# Altium PCB Smart_AC_Monitor.PcbDoc
Units mm, origin at the board's own origin, x right, y up, seen from the top; angles counter-clockwise.
Board outline 100 x 60 mm, 2 copper layers (Top Layer, Bottom Layer); 25 components, 14 nets, 116 pads, 52 vias.
Unrouted connection lines stored in the file: 3.
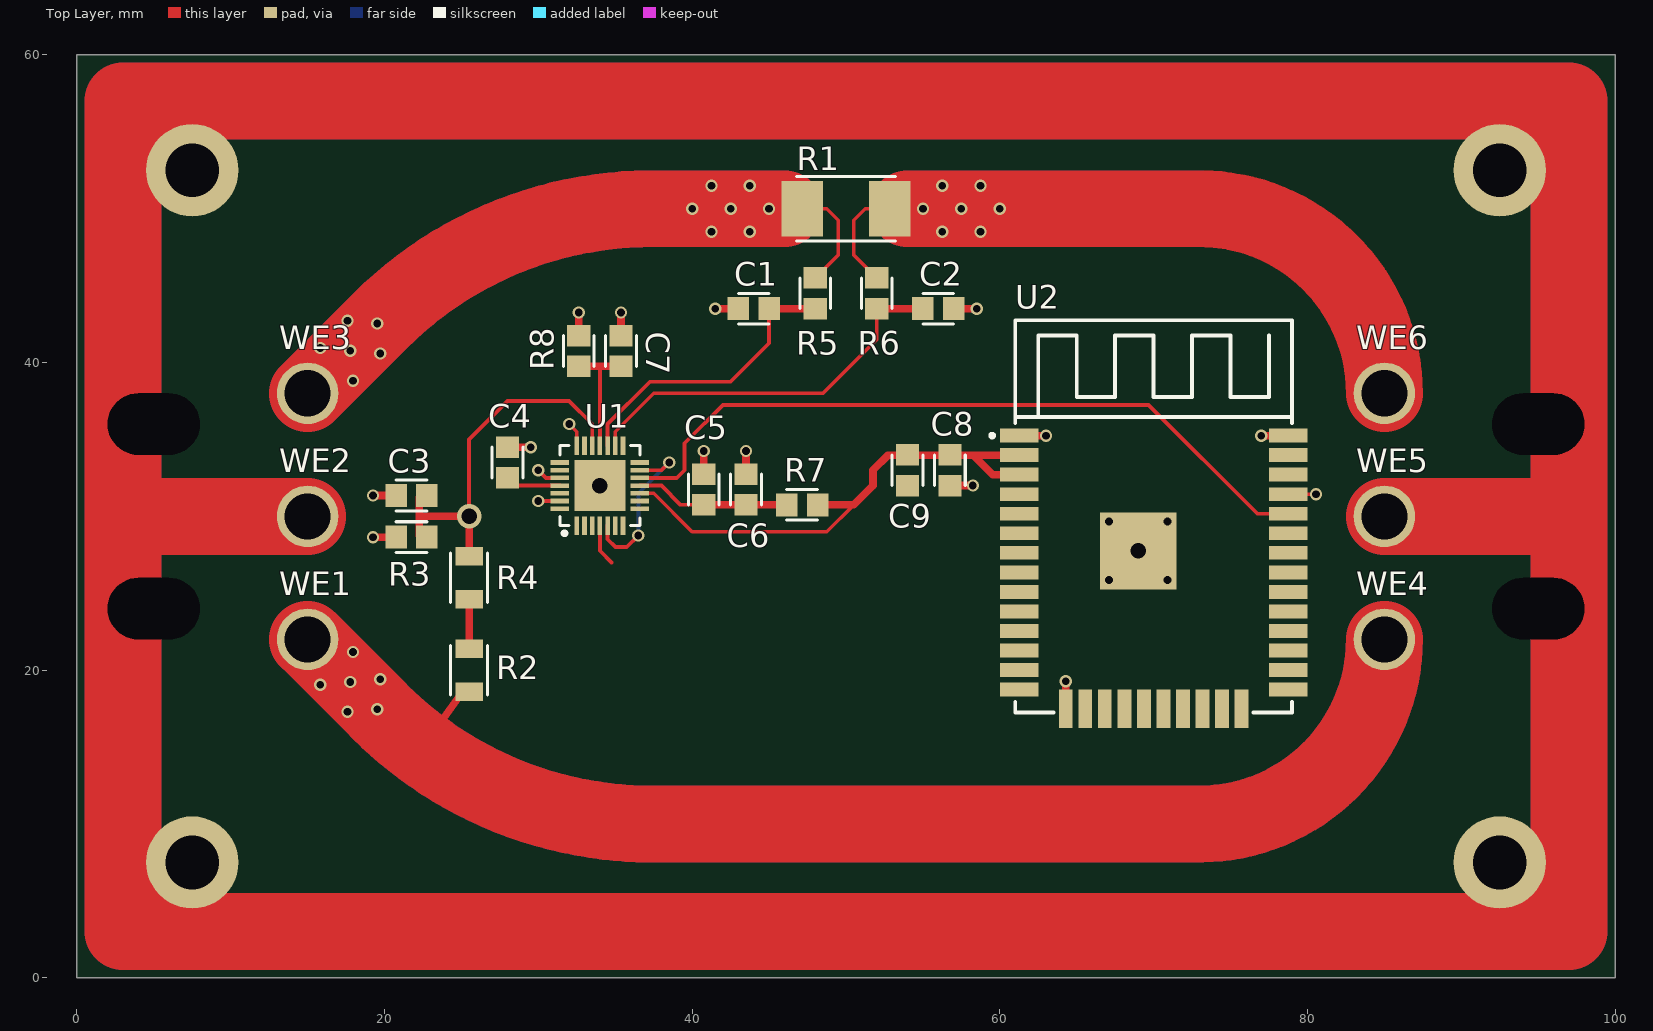
[diagram p0: Top Layer view]
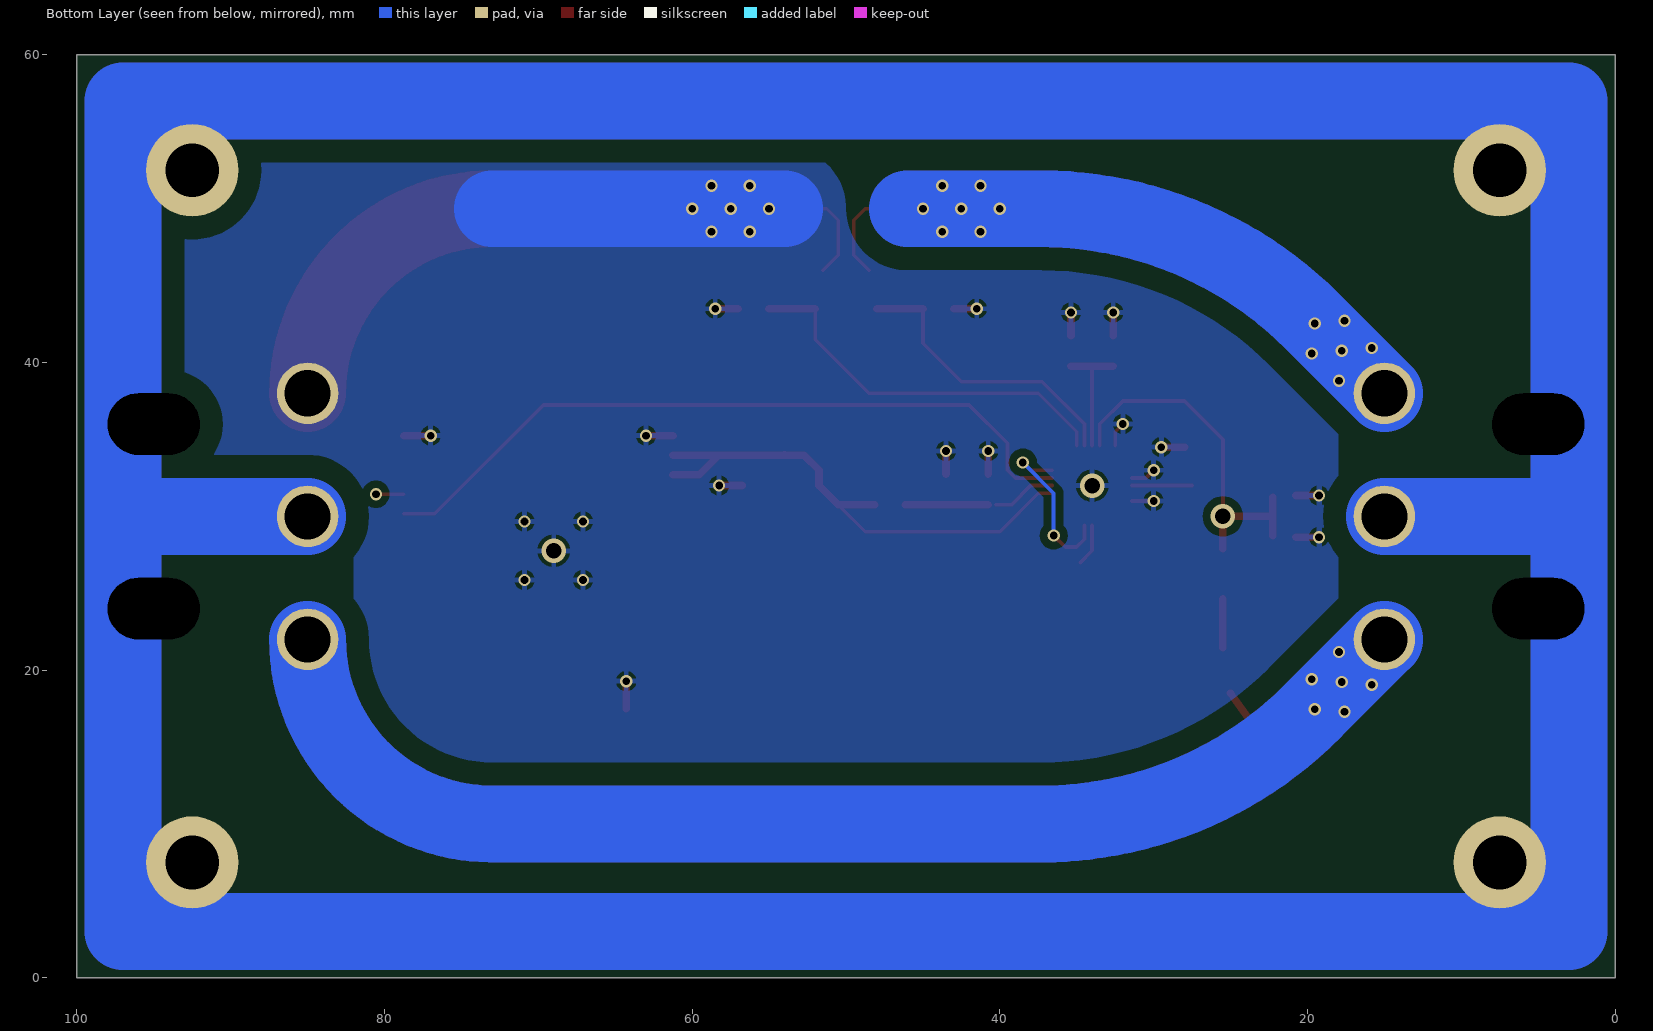
[diagram p1: Bottom Layer view, seen from below]

## Layer stack, top to bottom
Top Solder: solder mask 0.0102, Solder Resist, Dk 3.5
Top Layer: signal copper 0.0356
Dielectric 1: dielectric 0.32, FR-4, Dk 4.8
Bottom Layer: signal copper 0.0356
Bottom Solder: solder mask 0.0102, Solder Resist, Dk 3.5

## Board outline
0,0 100,0 100,60 0,60

## Design rules (kind name [scope] priority, off if disabled: settings)
Clearance Clearance_2 [InNamedPolygon('GND_L02_P000') vs InNet('EARTH')] p1: gap=1.5 ignorepadtopadclearanceinfootprint=FALSE
Clearance Clearance_4 [InNamedPolygon('GND_L02_P000') vs InNet('AC Neutral In')] p2: gap=1.5 ignorepadtopadclearanceinfootprint=FALSE
Clearance Clearance_3 [InNamedPolygon('GND_L02_P000') vs InNet('AC Live')] p3: gap=1.5 ignorepadtopadclearanceinfootprint=FALSE
Clearance Clearance_1 [InNamedPolygon('GND_L02_P000')] p4: gap=0.5 ignorepadtopadclearanceinfootprint=FALSE
Clearance [All] p5: gap=0.1 ignorepadtopadclearanceinfootprint=FALSE
PolygonConnect [All] p1: thpad.connectstyle=Direct thpad.reliefconductorwidth=0.254 thpad.reliefentries=4 thpad.polygonreliefangle="90 Angle" thpad.airgapwidth=0.254 smdpad.connectstyle=Direct smdpad.reliefconductorwidth=0.254 smdpad.reliefentries=4 smdpad.polygonreliefangle="90 Angle" smdpad.airgapwidth=0.254 via.connectstyle=Relief via.reliefconductorwidth=0.35 via.reliefentries=4 via.polygonreliefangle="90 Angle" via.airgapwidth=0.25
RoutingVias [All] p1: holewidth=0.5 width=0.6 viastyle="Through Hole" minholewidth=0.5 minwidth=0.8 maxholewidth=2.5 maxwidth=4
SolderMaskExpansion [All] p1: expansion=0.102
Width [All] p1: maxlimit=10 minlimit=0.2 preferedwidth=0.254 minimp=50.000000 maximp=50.000000 favimp=50.000000
30 further rules are at their usual default settings.

## Components (designator, comment, footprint, x,y, rotation, side; value= is the part's Value field where it differs from the comment)
C1 "Capacitor" 0805 44,43.5 r180 top
C2 "Capacitor" 0805 56,43.5 r0 top
C3 "Capacitor" 0805 21.75,31.35 r180 top
C4 "Capacitor" 0805 28,33.5 r90 top
C5 "Capacitor" 0805 40.75,31.75 r90 top
C6 "Capacitor" 0805 43.5,31.75 r90 top
C7 "Capacitor" 0805 35.375,40.75 r90 top
C8 "Capacitor" 0805 56.75,33 r270 top
C9 "Capacitor" 0805 54,33 r270 top
R1 "Resistor" 2512 50,50 r0 top
R2 "Resistor" 1206 25.5,20 r90 top
R3 "Resistor" 0805 21.75,28.65 r180 top
R4 "Resistor" 1206 25.5,26 r90 top
R5 "Resistor" 0805 48,44.5 r270 top
R6 "Resistor" 0805 52,44.5 r270 top
R7 "Resistor" 0805 47.15,30.75 r0 top
R8 "Resistor" 0805 32.625,40.75 r270 top
U1 "MCP39F511" MCP39F511 34,32 r90 top
U2 "ESP32-WROOM-32D" ESP32-WROOM-32D 70,35.25 r0 top
WE1 "Wire Entry" 12AWGWireEntry 15,22 r0 top
WE2 "Wire Entry" 12AWGWireEntry 15,30 r0 top
WE3 "Wire Entry" 12AWGWireEntry 15,38 r0 top
WE4 "Wire Entry" 12AWGWireEntry 85,22 r0 top
WE5 "Wire Entry" 12AWGWireEntry 85,30 r0 top
WE6 "Wire Entry" 12AWGWireEntry 85,38 r0 top

## Footprints (in the part's own frame and the unit in brackets; to place one, negate y for a bottom-side part, rotate by r counter-clockwise, add the part's x,y. Pads: shape width x height; smd on the part's side, far side on the other; paste and mask are expansions set on the pad)
12AWGWireEntry [mm]
  round 4 hole 3: 1(0,0)
0805 [mm] "Chip Resistor, Body 2.0x1.2mm, IPC Low Density"
  rect 1.4x1.5 smd: 1(-1,0) 2(1,0)
  silkscreen extent -1,-1 1,1, body extent -1.07,-0.7 1.07,0.7, height 0.7
1206 [mm] "Chip Resistor, Body 3.2x1.6mm"
  rect 1.2x1.8 smd: 1(-1.4,0) 2(1.4,0)
  silkscreen extent -1.6,-1.2 1.6,1.2, body extent -1.6,-0.8 1.6,0.8, height 0.7
2512 [mm] "Chip Resistor, Body 6.4x3.2mm, IPC Low Density"
  rect 2.7x3.6 smd: 1(-2.85,0) 2(2.85,0)
  silkscreen extent -3.2,-2.1 3.2,2.1, body extent -3.2,-1.6 3.2,1.6, height 0.7
ESP32-WROOM-32D [mm]
  rect 2.5x0.9 smd: 1(-8.75,0) 2(-8.75,-1.27) 3(-8.75,-2.54) 4(-8.75,-3.81) 5(-8.75,-5.08) 6(-8.75,-6.35) 7(-8.75,-7.62) 8(-8.75,-8.89) 9(-8.75,-10.16) 10(-8.75,-11.43) 11(-8.75,-12.7) 12(-8.75,-13.97) 13(-8.75,-15.24) 14(-8.75,-16.51) 25(8.75,-16.51) 26(8.75,-15.24) 27(8.75,-13.97) 28(8.75,-12.7) 29(8.75,-11.43) 30(8.75,-10.16) 31(8.75,-8.89) 32(8.75,-7.62) 33(8.75,-6.35) 34(8.75,-5.08) 35(8.75,-3.81) 36(8.75,-2.54) 37(8.75,-1.27) 38(8.75,0)
  rect 0.9x2.5 smd: 15(-5.715,-17.76) 16(-4.445,-17.76) 17(-3.175,-17.76) 18(-1.905,-17.76) 19(-0.635,-17.76) 20(0.635,-17.76) 21(1.905,-17.76) 22(3.175,-17.76) 23(4.445,-17.76) 24(5.715,-17.76)
  rect 5x5 smd: 39(-1,-7.49)
  silkscreen extent -10.6,-18 9,7.5, body extent -9.04,-17.99 9.03,7.55, height 3.04
MCP39F511 [mm]
  rect 1.2x0.3 smd: 1(-2.6,1.5) 2(-2.6,1) 3(-2.6,0.5) 4(-2.6,0) 5(-2.6,-0.5) 6(-2.6,-1) 7(-2.6,-1.5) 15(2.6,-1.5) 16(2.6,-1) 17(2.6,-0.5) 18(2.6,0) 19(2.6,0.5) 20(2.6,1) 21(2.6,1.5)
  rect 0.3x1.2 smd: 8(-1.5,-2.6) 9(-1,-2.6) 10(-0.5,-2.6) 11(0,-2.6) 12(0.5,-2.6) 13(1,-2.6) 14(1.5,-2.6) 22(1.5,2.6) 23(1,2.6) 24(0.5,2.6) 25(0,2.6) 26(-0.5,2.6) 27(-1,2.6) 28(-1.5,2.6)
  rect 3.3x3.3 smd: 29(0,0)
  silkscreen extent -3.2,-2.6 2.6,2.6, body extent -2.5,-2.5 2.5,2.5, height 1

## Part data
C1 C2 C3 C4 C5 C6 C7 C8 C9: "AVX Corporation 08055D104KAT2A", Capacitance="0.1 µF", Digikey Part Number=478-12790-1-ND, Package="0805 (2012 Metric)", Tolerance=±10%, Unique Part Number=LM_CAP_0001, Voltage="50 V", Manufacturer Part Number="AVX Corporation 08055D104KAT2A", Type (Ceramic, Aluminium, etc#)="Ceramic X5R"
R1: library part "2 mR 2512 (6432 Metric) Chip", Digikey Part Number=696-1836-1-ND, Manufacturer Part Number="Riedon CSRL3-0R002F8", Package="2512 (6432 Metric)", Power="3 W", Resistance="2 mR", Tolerance=0.01, Unique Part Number=LM_RES_0002, Type (Chip, Axial, etc#)=Chip
R2 R4: library part "499 kR 1206 (3216 Metric) Chip", Digikey Part Number=RMCF1206FT499KCT-ND, Manufacturer Part Number="Stackpole Electronics Inc RMCF1206FT499K", Package="1206 (3216 Metric)", Power="0.25 W", Resistance="499 kR", Tolerance=0.01, Unique Part Number=LM_RES_0003, Type (Chip, Axial, etc#)=Chip
R3 R5 R6 R7 R8: library part "1 kR 0805 (2012 Metric) Chip", Digikey Part Number=RMCF0805FT1K00CT-ND, Manufacturer Part Number="Stackpole Electronics Inc RMCF0805FT1K00", Package="0805 (2012 Metric)", Power="0.125 W", Resistance="1 kR", Tolerance=0.01, Unique Part Number=LM_RES_0001, Type (Chip, Axial, etc#)=Chip
U1: "Single Phase Meter IC 28-QFN (5x5)", Digikey Part Number=MCP39F511-E/MQ-ND, Manufacturer Part Number="Microchip Technology MCP39F511-E/MQ", Package="28-QFN (5x5)", Temperature Range="-40°C ~ 125°C", Unique Part Number=LM_IC_0001
U2: "Bluetooth, WiFi,3 Transceiver Module", Digikey Part Number=1904-1023-1-ND, Manufacturer Part Number="Espressif Systems ESP32-WROOM-32D", Package="38-SMD Module", Temperature Range="-40°C ~ 85°C", Unique Part Number=LM_IC_0002
WE1 WE2 WE3 WE4 WE5 WE6: "12 AWG Wire Entry", Unique Part Number=LM_OTH_0001

## Free pads (board coordinates)
  rrect100% 5x3 hole 4 slot 6 at 0 deg unplated: 2(5,24) 2(5,36) 2(95,24) 2(95,36)
  round 6 hole 3.5 unplated: 2(7.5,7.5) 2(7.5,52.5) 2(92.5,7.5) 2(92.5,52.5)

## Via types
v1: diameter 0.8, hole 0.5, Top Layer to Bottom Layer, 49 vias
v2: diameter 1.6, hole 1, Top Layer to Bottom Layer, 3 vias

## Nets (pads, with @x,y where several pads share a name; then routed paths per layer and width w, separated by ;. In a path a pad name is that pad's centre, name@x,y a point inside that pad or via, vN(x,y) a via of type N, cw(c..) or ccw(c..) an arc to the next point about the centre after c; other vN are vias at no path point)
"AC Live": R2.1 WE1.1 WE4.1 | length 169
  Top Layer w0.5: 22,16.25 22.76,16.25 ; 22.326,14.772 R2.1@25,18.5 ; 34.25,10 34.422,10.172 35.75,11.5
  Top Layer w5: WE1.1 19.68,17.32 ccw(c37.353,34.994) 22.326,15.022 ccw(c37.353,34.994) 34.422,10.172 ccw(c37.353,34.994) 37.353,10 58,10 73,10 ccw(c73,22) WE4.1
  Bottom Layer w5: WE1.1 19.68,17.32 ccw(c37.353,34.994) 34.422,10.172 ccw(c37.353,34.994) 37.353,10 58,10 73,10 ccw(c73,22) WE4.1
  other v1: 17.591,17.288 19.536,17.464 15.823,19.055 17.768,19.232 19.712,19.409 17.945,21.177
"AC Neutral In": R1.1 R5.1 WE3.1 | length 76.1
  Top Layer w0.25: R1.1 48.75,50 49.5,49.25 49.5,47 R5.1@48.5,46
  Top Layer w5: WE3.1 19.68,42.68 cw(c37.353,25.006) 37.353,50 R1.1@46,50
  Bottom Layer w5: WE3.1 19.68,42.68 cw(c37.353,25.006) 37.353,50 46,50
  other v1: 17.945,38.823 19.712,40.591 17.768,40.768 15.823,40.945 19.536,42.536 17.591,42.712 41.25,48.5 43.75,48.5 40,50 42.5,50 45,50 41.25,51.5 43.75,51.5
"AC V Sense": C3.1 R3.1 R4.2 U1.19 | length 23.9
  Top Layer w0.25: v2(25.5,30) 25.5,35 28,37.5 32,37.5 33.5,36 U1.19
  Top Layer w0.5: R3.1@22.25,28.75 22.25,30 ; C3.1@22.25,31.25 22.25,30 ; R4.2@25.5,27.9 v2(25.5,30) 22.25,30
EARTH: pad.2 WE2.1 WE5.1 | length 640
  Top Layer w5: 3,30 WE2.1 ; WE5.1 97,30 ; 3,3 3,40 3,57 97,57 97,3 3,3
  Bottom Layer w5: 3,30 WE2.1 ; WE5.1 97,30 ; 3,3 97,3 97,57 3,57 3,40 3,3
ESP_UART_RX: U1.12 U2.34 | length 48.1
  Top Layer w0.25: U1.12 39,32.5 39.5,33 39.5,34.75 42,37.25 69.67,37.25 76.75,30.17 U2.34
ESP_UART_TX: U1.4 U2.35 | length 4.5
  Top Layer w0.25: U1.4 34,27.76 34.76,27 ; U2.35 v1(80.56,31.44)
GND: C1.2 C2.2 C3.2 C4.2 C5.2 C6.2 C7.2 C8.2 C9.2 R1.2 R3.2 R6.1 R8.1 U1.21 U1.24 U1.27 U1.29 U2.1 U2.15 U2.38 U2.39 WE6.1 | length 88.1
  Top Layer w0.25: v1(30,31) U1.27 ; v1(30,33) 30.5,32.5 U1.24 ; v1(32,36) 32.5,35.5 U1.21 ; R6.1@51.5,46 50.5,47 50.5,49.25 51.25,50 R1.2
  Top Layer w0.5: v1(19.25,28.65) R3.2 ; v1(19.25,31.35) C3.2 ; C4.2 v1(29.5,34.5) ; R8.1 v1(32.625,43.25) ; C7.2 v1(35.375,43.25) ; C5.2 v1(40.75,34.25) ; v1(41.5,43.5) C1.2 ; C6.2 v1(43.5,34.25) ; C8.2 v1(58.25,32) ; C2.2 v1(58.5,43.5) ; U2.1 v1(63,35.25) ; U2.15 v1(64.285,19.285) ; v1(77,35.25) U2.38
  Top Layer w5: R1.2@54,50 v1(55,50) v1(57.5,50) v1(60,50) 73,50 cw(c73,38) WE6.1
  Bottom Layer w5: 54,50 v1(55,50) v1(57.5,50) v1(60,50) 73,50
  other v1: 67.1,25.86 70.9,25.86 67.1,29.66 70.9,29.66 56.25,48.5 58.75,48.5 56.25,51.5 58.75,51.5
  other v2: 69,27.76 34,32
NetC1_1: C1.1 R5.2 U1.17 | length 19.3
  Top Layer w0.25: U1.17 34.5,36 37.25,38.75 42.5,38.75 45,41.25 C1.1
  Top Layer w0.5: C1.1 R5.2
NetC2_1: C2.1 R6.2 U1.16 | length 25.4
  Top Layer w0.25: U1.16 35,35.5 37.5,38 48.5,38 52,41.5 R6.2
  Top Layer w0.5: R6.2 C2.1
NetC5_1: C5.1 C6.1 R7.1 U1.11 | length 9.6
  Top Layer w0.25: U1.11 38,32 39.25,30.75 C5.1@40.25,30.75
  Top Layer w0.5: C5.1 R7.1
NetC7_1: C7.1 R8.2 U1.18 | length 7.9
  Top Layer w0.25: U1.18 34,39.75
  Top Layer w0.5: R8.2 34,39.75 C7.1
NetR2_2: R2.2 R4.1 | length 3.2
  Top Layer w0.5: R2.2@25.5,21.45 R4.1@25.5,24.65
NetU1_5: U1.5 U1.13 | length 11.1
  Top Layer w0.25: U1.5 34.5,28.51 35.01,28 35.75,28 v1(36.5,28.75) ; U1.13 38,33 v1(38.5,33.5)
  Bottom Layer w0.25: v1(36.5,28.75) 36.5,31.5 v1(38.5,33.5)
V_3V3: C4.1 C8.1 C9.1 R7.2 U1.10 U1.25 U2.2 U2.3 | length 38.1
  Top Layer w0.25: C4.1@27.5,32 U1.25 ; U1.10 37.5,31.5 40,29 48.75,29 50.5,30.75
  Top Layer w0.5: R7.2 50.5,30.75 51.75,32 51.75,33 52.73,33.98 53.98,33.98 C9.1 54.02,33.98 58.27,33.98 ; U2.3 59.54,32.71 58.27,33.98 ; U2.2 58.27,33.98
pads on no net: U1.1 U1.2 U1.3 U1.6 U1.7 U1.8 U1.9 U1.14 U1.15 U1.20 U1.22 U1.23 U1.26 U1.28 U2.4 U2.5 U2.6 U2.7 U2.8 U2.9 U2.10 U2.11 U2.12 U2.13 U2.14 U2.16 U2.17 U2.18 U2.19 U2.20 U2.21 U2.22 U2.23 U2.24 U2.25 U2.26 U2.27 U2.28 U2.29 U2.30 U2.31 U2.32 U2.33 U2.36 U2.37

## Polygon pours and split planes (outlines as drawn)
GND on Bottom Layer "GND_L02_P000" (solid, remove dead copper, pour order 0): 50,50 cw(c54,50) 54,54 94,54 94,30 82,30 82,18 74,10 27,10 18,19 18,41 27,50